# Altium PCB final_sensor_pcb_v3.PcbDoc (part 3 of 3)
Units mm, origin at the board's own origin, x right, y up, seen from the top; angles counter-clockwise.
Board outline 108.2 x 22.22 mm, 2 copper layers (Top Layer, Bottom Layer); 92 components, 55 nets, 247 pads, 83 vias.
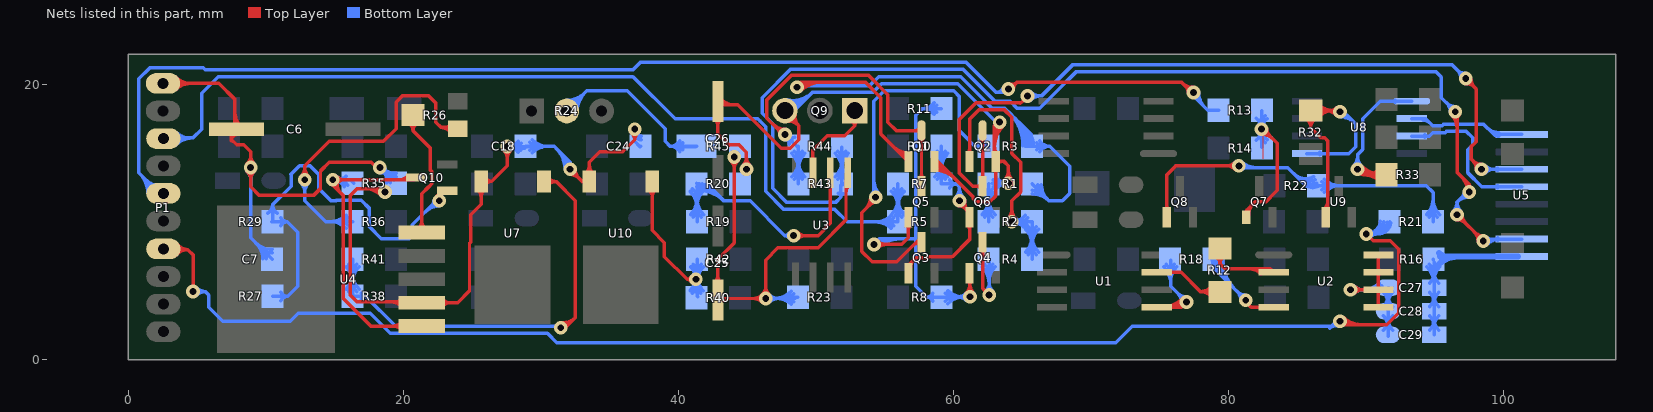
[diagram p3: the nets of this part, all layers, seen from the top]

## Via types
v1: diameter 1, hole 0.5, Top Layer to Bottom Layer, 83 vias

## Nets (pads, with @x,y where several pads share a name; then routed paths per layer and width w, separated by ;. In a path a pad name is that pad's centre, name@x,y a point inside that pad or via, vN(x,y) a via of type N, cw(c..) or ccw(c..) an arc to the next point about the centre after c; other vN are vias at no path point) (continued)
NetC25_1: C25.1 R23.1 R45.2 U3.5 | length 43.2
  Top Layer w0.254: C25.1@42.68,5.636 ccw(c42.214,6.102) 42.873,6.102 ccw(c43.532,6.102) C25.1@43.066,5.636 ; C25.1@42.873,4.343 42.873,7.289 44.069,8.486 v1(44.069,14.732) ; C25.1@43.053,4.572 42.926,4.445 v1(46.355,4.445) 46.355,7.239 47.244,8.128 50.165,8.128 52.197,10.16 52.197,13.458 U3.5@52.324,13.585 ; C25.1@43.066,4.15 cw(c43.777,3.439) 43.777,4.445 ; C25.1@43.066,4.536 ccw(c43.287,4.757) 43.287,4.445 ; v1@43.805,14.468 cw(c43.169,13.832) 44.069,13.832 cw(c44.969,13.832) v1@44.333,14.468 ; v1@46.091,4.181 ccw(c45.455,3.545) 45.455,4.445 ccw(c45.455,5.345) 46.091,4.709 ccw(c45.455,5.345) 46.355,5.345 ccw(c47.255,5.345) v1@46.619,4.709 ; 52.197,12.131 cw(c52.928,12.131) U3.5@52.411,12.648
  Bottom Layer w0.254: v1(44.069,14.732) R45.2@44.069,15.113 ; v1(46.355,4.445) R23.1@48.514,4.445 ; v1@46.619,4.181 cw(c47.255,3.545) 47.255,4.445 cw(c47.255,5.345) v1@46.619,4.709 ; 46.942,4.445 ccw(c46.942,6.246) R23.1@48.216,4.973 ; 47.192,4.445 cw(c47.192,2.997) R23.1@48.216,4.021 ; 47.556,4.445 ccw(c47.556,5.633) R23.1@48.396,4.793 ; 47.805,4.445 cw(c47.805,3.61) R23.1@48.396,4.2 ; R23.1@48.285,4.547 R23.1@48.692,4.547
NetC27_1: C27.1 C28.1 C29.1 U2.5 U2.6 U2.7 U2.8 | length 28
  Top Layer w0.254: v1(88.9,5.08) U2.6@90.928,5.08 ; v1@89.164,4.816 cw(c89.801,4.179) 89.801,5.08 cw(c89.8,5.98) v1@89.164,5.344 ; U2.6@89.991,4.993 ccw(c89.781,4.783) 89.781,5.08 ccw(c89.781,5.377) U2.6@89.991,5.167 ; U2.5@90.841,3.897 ccw(c90.631,4.107) 90.928,4.107 ccw(c91.225,4.107) U2.5@91.015,3.897 ; U2.6@90.841,4.993 cw(c90.631,4.783) 90.928,4.783 cw(c91.225,4.783) U2.6@91.015,4.993 ; U2.6@90.841,5.167 ccw(c90.631,5.377) 90.928,5.377 ccw(c91.225,5.377) U2.6@91.015,5.167 ; U2.7@90.841,6.263 cw(c90.631,6.053) 90.928,6.053 cw(c91.225,6.053) U2.7@91.015,6.263 ; U2.7@90.841,6.437 ccw(c90.631,6.647) 90.928,6.647 ccw(c91.225,6.647) U2.7@91.015,6.437 ; U2.8@90.841,7.533 cw(c90.631,7.323) 90.928,7.323 cw(c91.225,7.323) U2.8@91.015,7.533 ; U2.5@90.928,3.814 U2.6@90.928,5.08 ; U2.8@90.928,7.62 U2.7@90.928,6.35 U2.6@90.928,5.08
  Bottom Layer w0.254: v1(88.9,5.08) C27.1@91.631,5.08 ; v1@89.164,4.816 cw(c89.8,4.18) 89.8,5.08 cw(c89.8,5.98) v1@89.164,5.344 ; 89.821,5.08 ccw(c89.821,6.742) C27.1@90.996,5.567 ; 90.434,5.08 ccw(c90.434,6.129) C27.1@91.176,5.387 ; 90.557,5.08 cw(c90.557,4.458) C27.1@90.996,4.898 ; C29.1@91.296,2.138 ccw(c90.489,2.945) 91.631,2.945 ccw(c92.773,2.945) C29.1@91.965,2.138 ; C28.1@91.296,3.183 cw(c90.489,2.376) 91.631,2.376 cw(c92.773,2.376) C28.1@91.965,3.183 ; C28.1@91.296,3.852 ccw(c90.489,4.66) 91.631,4.66 ccw(c92.773,4.66) C28.1@91.965,3.852 ; C27.1@91.296,4.898 cw(c90.489,4.09) 91.631,4.09 cw(c92.773,4.09) C27.1@91.965,4.898 ; C29.1@91.631,1.714 C29.1@91.631,1.803 C28.1@91.631,3.518 C27.1@91.631,5.08 ; C27.1@91.631,5.232 C27.1@91.631,5.08 ; C27.1@91.694,5.08 C27.1@91.631,5.08
NetQ1_1: Q1.1 R1.1 R3.1 | length 62
  Top Layer w0.254: v1@48.546,19.907 cw(c49.235,19.218) 49.235,20.193 ; v1@48.641,19.939 48.895,20.193 53.594,20.193 54.737,19.05 54.737,16.415 Q1.1@56.739,14.413 ; v1@48.725,19.728 cw(c49.848,18.605) 49.848,20.193 ; v1@48.905,19.548 cw(c50.461,17.992) 50.461,20.193 ; 55.675,15.477 ccw(c56.739,16.54) Q1.1@56.739,15.036 ; 56.109,15.043 ccw(c56.739,15.673) Q1.1@56.739,14.782 ; Q1.1@56.543,14.609 ccw(c56.739,14.806) Q1.1@56.739,14.528
  Bottom Layer w0.254: v1(48.641,19.812) 48.768,19.939 53.935,19.939 54.57,20.574 60.535,20.574 61.585,19.524 62.821,18.288 63.754,18.288 65.659,16.383 R3.1@65.659,15.519 ; 64.065,17.977 cw(c61.657,15.569) R3.1@65.062,15.569 ; 64.498,17.544 cw(c62.524,15.569) R3.1@65.316,15.569 ; 64.932,17.11 cw(c63.391,15.569) R3.1@65.57,15.569 ; R3.1@65.253,15.519 R3.1@65.659,15.519 ; 65.366,16.676 cw(c64.259,15.569) R3.1@65.824,15.569 ; R1.1@65.735,12.053 cw(c65.735,10.308) 66.969,11.542 ; R1.1@65.735,12.307 cw(c65.735,11.175) 66.536,11.975 ; R1.1@65.735,12.776 66.954,11.557 67.945,11.557 68.473,12.085 68.473,14.077 67.031,15.519 ; R3.1@66.078,15.278 cw(c66.542,14.953) 66.542,15.519 cw(c66.542,16.086) R3.1@66.078,15.76 ; R1.1@66.154,12.726 ccw(c67.045,12.726) R1.1@66.415,12.096 ; R3.1@66.286,15.132 cw(c67.031,14.609) 67.031,15.519 ; R3.1@66.286,15.906 ccw(c67.031,16.43) 67.031,15.519 ; R1.1@66.408,12.726 ccw(c67.912,12.726) 66.849,11.663 ; R3.1@65.659,15.519 R3.1@65.735,15.519 67.031,15.519
NetQ1_3: Q1.3 Q5.3 R43.1 R44.1 | length 40.5
  Top Layer w0.254: 46.898,17.11 ccw(c47.752,17.963) v1@47.752,16.756 ; 47.205,16.803 cw(c46.785,16.383) v1@47.379,16.383 ; 47.332,16.676 ccw(c47.752,17.096) v1@47.752,16.502 ; v1@47.498,16.51 46.446,17.562 46.446,18.887 48.26,20.701 53.804,20.701 55.245,19.26 55.245,17.272 55.854,16.663 Q1.3@57.689,16.663 ; Q5.3@57.567,13.171 ccw(c57.271,13.467) 57.689,13.467 ccw(c58.107,13.467) Q5.3@57.811,13.171 ; Q1.3@57.567,16.091 cw(c57.271,15.795) 57.689,15.795 cw(c58.107,15.795) Q1.3@57.811,16.091 ; Q1.3@57.567,16.541 ccw(c57.271,16.245) 57.271,16.663 ccw(c57.271,17.081) Q1.3@57.567,16.785 ; Q5.3@57.689,12.599 Q1.3@57.689,16.541
  Bottom Layer w0.254: v1@47.752,16.01 cw(c47.752,15.11) 48.389,15.746 cw(c49.025,16.383) v1@48.125,16.383 ; v1(47.752,16.383) R44.1@48.641,15.494 ; R44.1@48.061,15.648 ccw(c47.273,15.74) 47.834,16.301 ccw(c48.23,16.698) R44.1@48.457,16.185 ; R43.1@48.253,13.302 ccw(c47.104,14.451) 48.729,14.451 ccw(c50.354,14.451) R43.1@49.205,13.302 ; R44.1@48.253,14.993 cw(c47.104,13.845) 48.729,13.845 cw(c50.354,13.845) R44.1@49.205,14.993 ; R43.1@48.433,13.122 ccw(c47.718,13.838) 48.729,13.838 ccw(c49.741,13.838) R43.1@49.025,13.122 ; R44.1@48.433,15.173 cw(c47.718,14.458) 48.729,14.458 cw(c49.741,14.458) R44.1@49.025,15.173 ; R43.1@48.729,12.776 R44.1@48.729,15.519 R44.1@48.729,15.533
NetQ2_1: Q2.1 R2.1 R4.1 | length 35
  Top Layer w0.254: Q2.1@61.062,14.985 ccw(c60.766,15.281) 61.184,15.281 ccw(c61.602,15.281) Q2.1@61.306,14.985 ; Q2.1@61.184,14.413 61.184,17.496 61.849,18.161 63.73,18.161 64.254,17.637 64.254,14.994 64.897,14.351 64.897,12.192 64.262,11.557 v1(64.262,10.033) ; v1@63.998,10.297 ccw(c63.362,10.933) 64.262,10.933 ccw(c65.162,10.933) v1@64.526,10.297
  Bottom Layer w0.254: v1(64.262,10.033) 64.168,10.033 v1@64.151,10.017 ; v1@64.526,9.769 cw(c65.123,9.172) R2.1@65.123,10.017 ; v1@64.526,10.297 ccw(c65.202,10.973) R2.1@65.202,10.017 ; R2.1@65.251,9.549 ccw(c64.151,8.49) v1@64.151,10.017 ; R2.1@65.251,10.484 cw(c64.151,11.543) v1@64.151,10.017 ; R4.1@65.259,7.816 ccw(c64.11,8.965) 65.735,8.965 ccw(c67.36,8.965) R4.1@66.211,7.816 ; R2.1@65.259,9.491 cw(c64.11,8.342) 65.735,8.342 cw(c67.36,8.342) R2.1@66.211,9.491 ; R2.1@65.434,9.726 ccw(c64.749,9.066) 64.749,10.017 ccw(c64.749,10.967) R2.1@65.434,10.307 ; R4.1@65.439,7.636 ccw(c64.724,8.351) 65.735,8.351 ccw(c66.747,8.351) R4.1@66.031,7.636 ; R2.1@65.439,9.67 cw(c64.724,8.955) 65.735,8.955 cw(c66.747,8.955) R2.1@66.031,9.67 ; R4.1@65.735,7.29 R2.1@65.735,10.017 v1@64.151,10.017
NetQ3_1: Q3.1 Q6.1 R7.1 R10.1 | length 28.3
  Top Layer w0.254: Q3.1@56.739,6.285 56.739,6.867 57.276,7.404 58.147,7.404 58.236,7.493 59.944,7.493 61.184,8.733 Q6.1@61.184,10.349 61.184,10.698 60.706,11.176 60.706,11.43 60.579,11.303 60.452,11.303 v1(60.452,11.557) ; Q3.1@56.912,6.735 cw(c57.648,6.735) 57.127,7.255 ; v1@60.452,11.184 cw(c60.452,10.59) 60.872,11.01 ; 60.757,11.125 ccw(c61.132,11.501) Q6.1@61.171,10.972 ; v1@60.824,11.536 ccw(c61.839,11.48) Q6.1@61.12,10.762 ; Q6.1@61.062,9.777 cw(c60.766,9.481) 61.184,9.481 cw(c61.602,9.481) Q6.1@61.306,9.777
  Bottom Layer w0.254: R7.1@58.655,13.302 ccw(c57.506,14.451) 59.131,14.451 ccw(c60.756,14.451) R7.1@59.607,13.302 ; R10.1@58.655,14.993 cw(c57.506,13.845) 59.131,13.845 cw(c60.756,13.845) R10.1@59.607,14.993 ; R7.1@58.835,13.122 ccw(c58.12,13.838) 59.131,13.838 ccw(c60.143,13.838) R7.1@59.427,13.122 ; R10.1@58.835,15.173 cw(c58.12,14.458) 59.131,14.458 cw(c60.143,14.458) R10.1@59.427,15.173 ; R10.1@59.131,15.519 R7.1@59.131,12.776 60.249,12.776 ; R7.1@59.726,12.461 cw(c60.249,12.185) 60.249,12.776 ; R7.1@59.726,13.091 ccw(c60.249,13.368) 60.249,12.776 ; v1@60.188,11.821 ccw(c59.552,12.457) 60.452,12.457 ccw(c61.352,12.457) v1@60.716,11.821 ; v1@60.452,11.684 60.452,12.573 60.249,12.776
NetQ3_3: Q3.3 R3.2 | length 35.5
  Top Layer w0.254: 53.629,10.957 ccw(c52.776,11.811) v1@53.983,11.811 ; 53.936,11.264 cw(c54.356,10.844) v1@54.356,11.438 ; 54.063,11.391 ccw(c53.643,11.811) v1@54.237,11.811 ; v1(54.356,11.811) 54.356,11.684 53.348,10.676 53.348,7.866 54.102,7.112 55.88,7.112 57.303,8.535 Q3.3@57.689,8.535 ; 57.11,8.342 cw(c57.382,8.071) Q3.3@57.594,8.391 ; 57.33,8.562 cw(c57.557,8.335) Q3.3@57.734,8.603 ; Q3.3@57.56,8.42 ccw(c57.303,8.191) 57.303,8.535 ccw(c57.303,8.879) Q3.3@57.56,8.65
  Bottom Layer w0.254: v1@54.092,12.075 ccw(c53.762,12.405) 54.229,12.405 ccw(c54.95,12.405) v1@54.44,11.895 ; 54.229,13.018 ccw(c55.563,13.018) v1@54.62,12.075 ; v1(54.356,11.811) 54.229,11.938 54.229,18.796 54.991,19.558 60.025,19.558 60.452,19.131 60.452,16.637 61.57,15.519 ; R3.2@61.949,15.265 ccw(c61.57,15.109) 61.57,15.519 ; R3.2@61.949,15.774 cw(c61.57,15.93) 61.57,15.519 ; R3.2@62.103,15.989 R3.2@62.572,15.519 61.57,15.519
NetQ4_1: Q4.1 Q5.1 R8.1 R11.1 | length 45.9
  Top Layer w0.254: v1(54.229,8.382) 56.261,8.382 56.739,8.86 Q5.1@56.739,10.349 Q5.1@56.674,10.414 ; v1@54.493,8.118 cw(c55.129,7.482) 55.129,8.382 cw(c55.129,9.282) v1@54.493,8.646 ; Q5.1@56.617,9.777 cw(c56.321,9.481) 56.739,9.481 cw(c57.157,9.481) Q5.1@56.861,9.777 ; v1@60.95,4.836 ccw(c60.314,5.472) 61.214,5.472 ccw(c62.114,5.472) v1@61.478,4.836 ; Q4.1@61.062,5.713 cw(c60.694,5.345) 61.214,5.345 ; v1(61.214,4.572) Q4.1@61.214,6.255 ; 61.214,5.49 cw(c61.529,5.49) Q4.1@61.306,5.713
  Bottom Layer w0.254: v1@54.134,8.477 cw(c54.878,7.733) 54.878,8.786 ; v1(54.229,8.382) 54.633,8.786 57.173,8.786 57.277,8.89 ; v1@54.313,8.298 cw(c55.491,7.12) 55.491,8.786 ; v1@54.493,8.118 cw(c56.104,6.507) 56.104,8.786 ; R8.1@58.524,4.257 ccw(c58.064,4.038) 58.064,4.547 ; R8.1@58.524,4.836 cw(c58.064,5.055) 58.064,4.547 ; R11.1@58.599,17.851 ccw(c57.76,17.201) 57.76,18.263 ; R11.1@58.599,18.674 cw(c57.76,19.324) 57.76,18.263 ; R11.1@58.8,18.006 ccw(c58.277,17.602) 58.277,18.263 ccw(c58.277,18.923) R11.1@58.8,18.519 ; R11.1@59.131,18.263 57.76,18.263 ; R8.1@59.427,4.25 cw(c60.143,3.535) 60.143,4.547 cw(c60.143,5.558) R8.1@59.427,4.843 ; R8.1@59.607,4.071 cw(c60.756,2.922) 60.756,4.547 cw(c60.756,6.171) R8.1@59.607,5.022 ; 60.252,4.547 ccw(c60.252,5.534) v1@60.95,4.836 ; 60.375,4.547 cw(c60.375,3.733) v1@60.95,4.308 ; v1(61.214,4.572) 61.189,4.547 R8.1@59.131,4.547 58.064,4.547 ; 57.277,8.89 57.277,17.78 57.76,18.263 ; 57.277,8.89 57.277,5.334 58.064,4.547
NetQ4_3: Q4.3 R4.2 | length 12.9
  Top Layer w0.254: Q4.3@62.012,7.963 cw(c61.716,7.667) 62.134,7.667 cw(c62.552,7.667) Q4.3@62.256,7.963 ; Q4.3@62.134,8.535 62.134,5.176 v1(62.611,4.699)
  Bottom Layer w0.254: R4.2@62.096,6.764 cw(c60.854,5.521) 62.611,5.521 ; R4.2@62.276,6.944 cw(c61.467,6.135) 62.611,6.135 ; v1@62.347,4.963 ccw(c61.711,5.599) 62.611,5.599 ccw(c63.511,5.599) v1@62.875,4.963 ; R4.2@62.572,7.29 62.611,7.251 v1(62.611,4.699) ; 62.611,5.709 cw(c64.103,5.709) R4.2@63.048,6.764 ; 62.611,6.322 cw(c63.49,6.322) R4.2@62.868,6.944
NetQ7_1: Q7.1 R13.2 R14.2 | length 23.7
  Top Layer w0: 82.55,14.629 v1@82.55,16.637
  Top Layer w0.254: Q7.1@81.233,10.549 cw(c81.712,10.549) 81.373,10.888 ; Q7.1@81.314,10.38 Q7.1@81.314,10.349 81.314,10.829 81.953,11.468 82.721,11.468 83.566,12.313 83.566,15.748 v1@82.55,16.764 ; Q7.1@81.487,10.549 cw(c82.579,10.549) 81.807,11.322 ; v1@82.423,16.391 cw(c82.423,15.184) 83.277,16.037 ; v1@82.423,16.645 cw(c82.423,16.051) 82.843,16.471 ; v1@82.796,16.764 ccw(c83.39,16.764) 82.97,16.344
  Bottom Layer w0.254: R14.2@82.04,15.968 ccw(c81.404,16.764) v1(82.423,16.764) ; R13.2@82.04,17.56 cw(c81.403,16.764) v1(82.423,16.764) ; v1@82.159,16.5 cw(c81.523,15.864) 82.423,15.864 cw(c83.323,15.864) v1@82.687,16.5 ; v1@82.159,17.028 ccw(c81.523,17.664) 82.423,17.664 ccw(c83.323,17.664) v1@82.687,17.028 ; R14.2@82.423,15.43 v1(82.423,16.764) ; v1@82.423,16.291 ccw(c83.022,16.291) R14.2@82.692,15.792 ; v1@82.423,17.236 cw(c83.023,17.236) R13.2@82.692,17.736 ; R13.2@82.423,18.098 v1(82.423,16.764) ; R14.2@82.832,16.004 cw(c83.335,16.764) v1(82.423,16.764) ; R13.2@82.832,17.524 ccw(c83.335,16.764) v1(82.423,16.764)
NetQ8_1: Q8.1 R21.2 R22.2 | length 43.3
  Top Layer w0.254: Q8.1@75.413,10.921 ccw(c75.117,11.217) 75.535,11.217 ccw(c75.953,11.217) Q8.1@75.657,10.921 ; Q8.1@75.535,10.349 75.535,13.432 76.2,14.097 v1(80.772,14.097) ; v1@80.508,13.833 ccw(c79.872,13.197) 79.872,14.097 ccw(c79.872,14.997) v1@80.508,14.361
  Bottom Layer w0.254: v1(80.772,14.097) 80.899,13.97 84.328,13.97 85.649,12.649 R22.2@86.524,12.649 94.412,12.649 94.908,12.153 R21.2@94.908,10.016 ; v1@80.856,14.181 ccw(c81.366,14.691) 81.366,13.97 ccw(c81.366,13.503) v1@81.036,13.833 ; v1@81.036,14.361 ccw(c81.979,15.304) 81.979,13.97 ; 84.791,13.507 ccw(c85.645,14.361) R22.2@86.21,13.294 ; 85.034,13.264 ccw(c85.813,14.043) R22.2@86.328,13.069 ; 85.277,13.021 ccw(c85.981,13.725) R22.2@86.447,12.845 ; 85.52,12.778 ccw(c86.15,13.407) R22.2@86.566,12.62 ; R22.2@86.821,12.353 cw(c87.536,11.637) 87.536,12.649 cw(c87.536,13.661) R22.2@86.821,12.945 ; R22.2@87,12.173 cw(c88.149,11.024) 88.149,12.649 cw(c88.149,14.274) R22.2@87,13.125 ; R21.2@94.432,10.542 ccw(c93.283,11.691) 94.908,11.691 ccw(c96.533,11.691) R21.2@95.384,10.542 ; R21.2@94.612,10.363 ccw(c93.896,11.078) 94.908,11.078 ccw(c95.919,11.078) R21.2@95.204,10.363
NetQ9_1: Q9.1 U3.7 | length 8
  Top Layer w0.254: U3.7@49.697,14.522 ccw(c49.487,14.732) 49.784,14.732 ccw(c50.081,14.732) U3.7@49.871,14.522 ; U3.7@49.784,13.585 49.784,15.24 50.825,16.281 52.095,16.281 52.832,17.018 ; Q9.1@52.59,17.35 cw(c52.484,17.018) 52.832,17.018 ; Q9.1@52.705,17.475 52.832,17.602 Q9.1@52.826,17.602 ; Q9.1@52.832,18.034 52.832,17.018 ; Q9.1@53.074,17.35 ccw(c53.18,17.018) 52.832,17.018
NetQ10_1: Q10.1 R27.1 R29.2 | length 37.4
  Top Layer w0.254: v1@22.424,11.883 ccw(c22.252,12.192) Q10.1@22.606,12.192 ; v1(22.606,11.557) Q10.1@22.606,12.192 ; v1@22.606,11.574 cw(c23.444,11.574) Q10.1@22.851,12.167 ; Q10.1@22.733,12.319 Q10.1@22.606,12.192 ; v1@22.788,11.883 cw(c22.96,12.192) Q10.1@22.606,12.192
  Bottom Layer w0.254: R29.2@10.138,10.662 ccw(c9.782,11.263) 10.48,11.263 ; R29.2@10.414,10.033 11.557,10.033 ; R29.2@10.48,10.607 R29.2@10.48,10.033 10.48,11.263 ; R27.1@10.49,4.597 11.582,4.597 ; R29.2@10.823,10.662 cw(c11.179,11.263) 10.48,11.263 ; R29.2@11.085,9.738 cw(c11.557,9.508) 11.557,10.033 ; R29.2@11.085,10.328 ccw(c11.557,10.558) 11.557,10.033 ; R27.1@11.091,4.295 cw(c11.582,4.048) 11.582,4.597 ; R27.1@11.091,4.9 ccw(c11.582,5.147) 11.582,4.597 ; 15.102,11.592 16.937,11.592 17.534,10.995 17.534,9.668 18.4,8.802 20.428,8.802 20.651,9.025 20.651,9.799 v1@22.409,11.557 ; 15.113,11.557 14.732,11.557 13.843,12.446 13.843,13.462 13.208,14.097 12.446,14.097 11.822,13.473 11.837,13.459 11.837,12.62 10.48,11.263 ; 21.633,10.781 cw(c22.606,9.807) v1@22.606,11.184 ; 22.066,11.214 cw(c22.606,10.674) v1@22.606,11.438 ; 22.109,11.257 ccw(c21.809,11.557) v1@22.233,11.557 ; v1@22.225,11.557 v1@22.409,11.557 ; v1(22.606,11.557) v1@22.409,11.557 ; 11.557,10.033 12.319,9.271 12.319,5.334 11.582,4.597
NetQ10_3: Q10.3 R35.1 U4.1 | length 32.5
  Top Layer w0.254: v1@14.973,13.047 ccw(c15.569,12.869) 15.129,12.43 ; v1@15.123,12.817 cw(c15.759,12.181) 15.759,13.081 cw(c15.759,13.981) v1@15.123,13.345 ; v1@15.216,12.974 ccw(c16.033,12.731) 15.43,12.129 ; 19.68,13.081 ccw(c19.68,14.038) Q10.3@20.357,13.361 ; U4.1@19.872,2.178 ccw(c19.236,1.542) 19.236,2.442 ccw(c19.236,3.342) U4.1@19.872,2.706 ; Q10.3@20.929,13.239 20.771,13.081 15.175,13.081 15.017,13.239 v1(14.859,13.081) 14.859,12.7 15.621,11.938 15.621,4.445 17.624,2.442 U4.1@21.336,2.442
  Bottom Layer w0.254: v1@15.123,12.817 cw(c15.759,12.181) 15.759,13.081 cw(c15.759,13.981) v1@15.123,13.345 ; v1@15.184,13.081 ccw(c15.184,13.996) R35.1@15.831,13.349 ; v1@15.277,13.081 cw(c15.277,12.34) R35.1@15.935,12.681 ; R35.1@15.709,12.564 ccw(c14.859,12.124) v1(14.859,13.081) 16.129,13.081 R35.1@16.383,12.827
NetR12_1: R12.1 U2.2 | length 8.4
  Top Layer w0.254: R12.1@79.08,7.497 cw(c78.789,6.96) 79.4,6.96 ; R12.1@79.4,8.089 79.4,6.96 ; R12.1@79.721,7.497 ccw(c80.012,6.96) 79.4,6.96 ; 81.552,6.604 cw(c81.552,5.44) U2.2@82.375,6.263 ; 82.165,6.604 cw(c82.165,6.053) U2.2@82.555,6.443 ; U2.2@83.189,6.35 ccw(c82.892,6.35) 83.102,6.56 ccw(c83.312,6.77) U2.2@83.312,6.473 ; U2.2@83.312,6.35 83.058,6.604 79.756,6.604 79.4,6.96
NetR18_1: R18.1 U2.4 | length 14.8
  Top Layer w0.254: v1(81.28,4.318) 81.28,4.191 81.661,3.81 U2.4@83.312,3.81 ; U2.4@82.375,3.723 ccw(c82.165,3.513) 82.165,3.81 ccw(c82.165,4.107) U2.4@82.375,3.897
  Bottom Layer w0.254: R18.1@78.854,7.24 ccw(c80.051,7.24) 79.205,6.393 ; R18.1@78.943,7.29 78.943,6.655 v1(81.28,4.318) ; R18.1@79.108,7.24 ccw(c80.918,7.24) 79.638,5.96 ; R18.1@79.362,7.24 ccw(c81.786,7.24) 80.072,5.526 ; R18.1@79.616,7.24 ccw(c82.653,7.24) 80.506,5.092 ; v1@80.907,4.318 ccw(c80.007,4.318) 80.643,4.955 ccw(c81.28,5.591) v1@81.28,4.691
NetR19_2: R19.2 R20.1 U3.6 | length 34.1
  Top Layer w0.254: v1(48.387,9.017) 50.165,9.017 51.054,9.906 U3.6@51.054,13.585 ; v1@48.651,8.753 cw(c49.287,8.117) 49.287,9.017 cw(c49.287,9.917) v1@48.651,9.281 ; U3.6@50.967,12.648 cw(c50.757,12.438) 51.054,12.438 cw(c51.351,12.438) U3.6@51.141,12.648
  Bottom Layer w0.254: R20.1@40.85,12.25 cw(c39.611,11.011) 41.363,11.011 ; R19.2@40.887,10.543 ccw(c39.738,11.691) 41.363,11.691 ccw(c42.988,11.691) R19.2@41.839,10.543 ; R20.1@41.03,12.43 cw(c40.224,11.624) 41.363,11.624 ; R19.2@41.067,10.363 ccw(c40.352,11.078) 41.363,11.078 ccw(c42.375,11.078) R19.2@41.659,10.363 ; R20.1@41.322,12.815 cw(c41.397,11.247) 42.507,12.357 ; R20.1@41.334,12.561 cw(c41.434,10.472) 42.913,11.951 ; R20.1@41.346,12.308 cw(c41.471,9.697) 43.319,11.545 ; R19.2@41.363,10.017 R20.1@41.363,12.739 ; 41.363,11.192 cw(c42.86,11.192) R20.1@41.802,12.25 ; 41.363,11.805 cw(c42.247,11.805) R20.1@41.622,12.43 ; R20.1@41.402,12.7 42.164,12.7 43.319,11.545 ; v1@48.061,8.835 ccw(c47.752,8.663) 47.752,9.017 ; v1@48.061,9.199 cw(c47.752,9.371) 47.752,9.017 ; v1(48.387,9.017) 47.752,9.017 ; 43.319,11.545 45.224,11.545 47.752,9.017
NetR24_2: R24.2 R45.1 | length 20.9
  Bottom Layer w0.254: R24.2@31.877,18.085 33.35,19.558 36.278,19.558 39.036,16.8 39.036,15.875 39.392,15.519 ; R24.2@31.877,18.604 ccw(c31.877,19.857) 32.763,18.971 ccw(c33.649,18.085) R24.2@32.396,18.085 ; R24.2@31.877,18.858 ccw(c31.877,20.724) 33.197,19.405 ccw(c34.516,18.085) R24.2@32.65,18.085 ; R45.1@40.12,15.125 ccw(c39.392,14.651) 39.392,15.519 ; R45.1@40.12,15.914 cw(c39.392,16.388) 39.392,15.519 ; R45.1@40.333,15.263 ccw(c39.861,14.956) 39.861,15.519 ccw(c39.861,16.083) R45.1@40.333,15.775 ; R45.1@40.386,15.494 R45.1@41.275,15.494 ; R45.1@41.326,15.519 39.392,15.519
NetR26_1: R26.1 R36.1 | length 31.7
  Top Layer w0.254: v1@12.563,13.345 ccw(c11.927,13.981) 12.827,13.981 ccw(c13.727,13.981) v1@13.091,13.345 ; v1@12.827,13.208 12.827,14.097 14.613,15.883 18.55,15.883 19.471,16.804 19.471,18.738 19.91,19.177 21.844,19.177 22.352,18.669 22.352,17.272 22.733,16.891 ; 22.978,16.891 ccw(c22.978,17.654) R26.1@23.518,17.114 ; 23.22,16.891 cw(c23.22,16.339) R26.1@23.672,16.655 ; R26.1@23.464,16.51 ccw(c22.733,16) 22.733,16.891 ; R26.1@24.003,16.891 22.733,16.891
  Bottom Layer w0.254: v1@12.563,12.817 cw(c11.927,12.181) 12.827,12.181 cw(c13.727,12.181) v1@13.091,12.817 ; v1(12.827,13.081) 12.827,11.557 14.351,10.033 R36.1@16.307,10.033 ; R36.1@15.831,9.557 ccw(c14.682,8.408) 14.682,10.033 ccw(c14.682,11.658) R36.1@15.831,10.509 ; R36.1@16.011,9.737 ccw(c15.295,9.022) 15.295,10.033 ccw(c15.295,11.045) R36.1@16.011,10.329
NetR26_2: R26.2 U4.5 | length 12
  Top Layer w0.254: R26.2@20.375,17.192 cw(c20.066,16.637) 20.701,16.637 ; R26.2@20.701,17.653 20.701,16.637 ; R26.2@21.028,17.191 ccw(c21.334,16.637) 20.701,16.637 ; U4.5@21.072,9.506 ccw(c20.436,10.142) 21.336,10.142 ccw(c22.236,10.142) U4.5@21.6,9.506 ; U4.5@21.336,9.242 21.336,12.065 21.829,12.558 21.837,12.558 22.06,12.781 22.06,13.697 21.971,13.786 21.971,15.367 20.701,16.637
NetR32_1: R32.1 U8.5 U9.1 | length 27.7
  Top Layer w0.254: R32.1@85.636,17.547 cw(c85.19,16.866) 86.004,16.866 ; R32.1@86.351,17.814 cw(c87.066,17.099) 87.066,18.11 cw(c87.066,19.122) R32.1@86.351,18.406 ; R32.1@86.373,17.547 ccw(c86.819,16.866) 86.004,16.866 ; R32.1@86.53,17.634 cw(c87.679,16.485) 87.679,18.11 cw(c87.679,19.735) R32.1@86.53,18.586 ; U9.1@86.97,10.921 ccw(c86.328,11.563) 87.235,11.563 ; 87.054,18.11 cw(c87.054,16.95) v1@87.874,17.77 ; U9.1@87.092,10.349 87.235,10.492 87.235,15.905 87.012,16.128 86.742,16.128 86.004,16.866 ; 87.421,18.11 ccw(c87.421,18.751) v1@87.874,18.298 ; v1@88.062,18.11 R32.1@86.004,18.11 86.004,16.866
  Bottom Layer w0.254: U8.5@85.729,14.986 88.773,14.986 89.281,15.494 89.281,17.145 88.646,17.78 88.392,17.78 v1(88.138,18.034) ; U8.5@86.666,14.899 cw(c86.876,14.689) 86.876,14.986 cw(c86.876,15.283) U8.5@86.666,15.073 ; v1@88.138,17.661 cw(c88.138,16.147) 89.208,17.218 ; v1@88.138,17.915 cw(c88.138,17.015) 88.775,17.651
NetR33_2: R33.2 U8.1 | length 20.2
  Top Layer w0.254: v1@89.313,13.748 ccw(c90.063,14.498) 90.063,13.437 ; v1(89.408,13.843) 89.814,13.437 R33.2@91.528,13.437 ; v1@89.492,13.927 ccw(c90.676,15.111) 90.676,13.437 ; v1@89.672,14.107 ccw(c91.29,15.725) R33.2@91.29,13.437 ; R33.2@91.052,12.961 ccw(c89.903,11.812) 89.903,13.437 ccw(c89.903,15.061) R33.2@91.052,13.912 ; R33.2@91.232,13.14 ccw(c90.517,12.425) 90.517,13.437 ccw(c90.517,14.448) R33.2@91.232,13.733
  Bottom Layer w0.254: v1@89.144,14.107 ccw(c88.508,14.743) 89.408,14.743 ccw(c90.308,14.743) v1@89.672,14.107 ; v1(89.408,13.843) 89.408,14.903 89.789,15.284 89.789,17.526 91.059,18.796 U8.1@93.345,18.796 ; U8.1@92.158,18.709 ccw(c91.948,18.499) 91.948,18.796 ccw(c91.948,19.093) U8.1@92.158,18.883
NetR38_1: R38.1 R41.2 U7.1 | length 44.1
  Top Layer w0.254: U7.1@30.353,12.954 31.115,12.954 ; U7.1@30.489,12.707 cw(c31.084,12.112) 31.084,12.954 ; U7.1@30.499,13.224 ccw(c31.115,13.791) 31.115,12.954 ; v1@31.457,2.436 ccw(c31.55,3.263) 32.139,2.675 ; v1@31.486,2.689 ccw(c31.626,3.934) 32.512,3.048 ; v1@31.623,2.159 32.512,3.048 ; 31.115,12.954 32.512,11.557 32.512,3.048
  Bottom Layer w0.254: R38.1@15.831,5.123 ccw(c14.682,6.272) 16.307,6.272 ccw(c17.932,6.272) R38.1@16.783,5.123 ; R41.2@15.831,6.764 cw(c14.682,5.615) 16.307,5.615 cw(c17.932,5.615) R41.2@16.783,6.764 ; R38.1@16.011,4.944 ccw(c15.295,5.659) 16.307,5.659 ccw(c17.318,5.659) R38.1@16.603,4.944 ; R41.2@16.011,6.944 cw(c15.295,6.228) 16.307,6.228 cw(c17.318,6.228) R41.2@16.603,6.944 ; R41.2@16.307,7.29 R38.1@16.307,4.597 17.247,4.597 ; R38.1@16.944,4.381 cw(c17.247,4.278) 17.247,4.597 ; R38.1@16.944,4.814 ccw(c17.247,4.917) 17.247,4.597 ; v1(31.444,2.318) 31.444,2.488 31.496,2.488 31.496,2.286 31.369,2.413 19.431,2.413 17.247,4.597
NetR40_1: R40.1 R42.2 U10.1 | length 25.8
  Top Layer w0.254: U10.1@37.835,12.407 cw(c37.198,11.771) 38.099,11.771 cw(c38.999,11.771) U10.1@38.363,12.407 ; U10.1@38.099,12.971 38.099,9.399 38.989,8.509 38.989,7.493 40.64,5.842 ; v1@40.949,5.66 ccw(c40.64,5.488) 40.64,5.842 ; v1@40.949,6.024 cw(c40.64,6.196) 40.64,5.842 ; v1(41.275,5.842) 40.64,5.842
  Bottom Layer w0.254: R40.1@40.85,5.022 ccw(c39.611,6.261) v1@41.363,6.261 ; R42.2@40.887,6.764 cw(c39.738,5.615) 41.363,5.615 cw(c42.988,5.615) R42.2@41.839,6.764 ; v1@41.011,5.578 cw(c40.162,4.729) R40.1@41.363,4.729 ; v1@41.011,6.106 ccw(c40.162,6.955) R42.2@41.363,6.955 ; R40.1@41.03,4.842 ccw(c40.224,5.648) v1@41.363,5.648 ; R42.2@41.067,6.944 cw(c40.352,6.228) 41.363,6.228 cw(c42.375,6.228) R42.2@41.659,6.944 ; v1@41.191,5.758 cw(c40.775,5.342) R40.1@41.363,5.342 ; v1@41.191,5.926 ccw(c40.775,6.342) 41.363,6.342 ; R40.1@41.363,5.154 cw(c41.963,5.154) v1@41.539,5.578 ; v1@41.363,5.467 ccw(c42.247,5.467) R40.1@41.622,4.842 ; v1@41.363,6.08 ccw(c42.86,6.08) R40.1@41.802,5.022 ; R42.2@41.363,6.53 ccw(c41.963,6.53) v1@41.539,6.106 ; R42.2@41.363,7.29 41.363,4.611 R40.1@41.402,4.572
OFFSET+: R43.2 R44.2 U5.2 | length 109.2
  Top Layer w0.254: v1@96.256,17.77 cw(c95.313,16.827) 96.647,16.827 ; v1@96.436,17.95 cw(c95.926,17.44) 96.647,17.44 cw(c97.114,17.44) v1@96.784,17.77 ; v1@96.647,10.168 cw(c96.647,9.268) 97.284,9.904 cw(c97.92,10.541) v1@97.02,10.541 ; v1(96.647,10.541) v1(98.552,8.636) ; v1@96.647,18.145 96.647,13.633 97.536,12.744 v1(97.536,12.192) ; 96.943,13.337 cw(c95.798,12.192) v1@97.417,12.192 ; 97.376,12.903 cw(c96.665,12.192) v1@97.671,12.192 ; v1@98.179,8.636 ccw(c97.279,8.636) 97.915,9.273 ccw(c98.552,9.909) v1@98.552,9.009
  Bottom Layer w0.254: R43.2@51.416,13.302 ccw(c50.267,14.451) 51.892,14.451 ccw(c53.517,14.451) R43.2@52.368,13.302 ; R44.2@51.416,14.993 cw(c50.267,13.845) 51.892,13.845 cw(c53.517,13.845) R44.2@52.368,14.993 ; R43.2@51.596,13.122 ccw(c50.881,13.838) 51.892,13.838 ccw(c52.904,13.838) R43.2@52.188,13.122 ; R44.2@51.596,15.173 cw(c50.881,14.458) 51.892,14.458 cw(c52.904,14.458) R44.2@52.188,15.173 ; R43.2@51.619,12.111 cw(c51.484,11.808) 51.816,11.808 cw(c52.08,11.808) R43.2@52.027,12.067 ; R43.2@51.816,12.7 51.816,11.811 51.435,11.43 47.887,11.43 46.863,12.454 46.863,17.152 46.101,17.914 46.101,19.05 48.189,21.138 60.689,21.138 63.032,18.796 64.135,18.796 64.635,18.296 66.302,18.296 67.31,19.304 ; R44.2@51.892,15.443 R43.2@51.892,12.776 ; R43.2@51.943,12.725 R43.2@51.892,12.776 ; R43.2@51.943,12.827 R43.2@51.892,12.776 ; 67.373,19.367 67.31,19.304 ; v1@96.147,18.034 ccw(c95.247,18.034) 95.883,18.671 ccw(c96.52,19.307) v1@96.52,18.407 ; v1@96.383,10.805 ccw(c95.747,11.441) 96.647,11.441 ccw(c97.547,11.441) v1@96.911,10.805 ; v1(96.52,18.034) 95.496,19.058 95.496,20.558 95.099,20.955 68.961,20.955 67.31,19.304 ; 96.641,11.448 cw(c97.536,10.554) v1@97.536,11.819 ; v1(96.647,10.541) 96.647,11.454 v1@97.46,12.268 ; 97.006,11.813 ccw(c96.627,12.192) v1@97.163,12.192 ; 97.075,11.882 cw(c97.536,11.421) v1@97.536,12.073 ; v1(98.552,8.636) 98.425,8.763 U5.2@101.346,8.763 ; v1@98.636,8.552 cw(c99.146,8.042) 99.146,8.763 cw(c99.146,9.23) v1@98.816,8.9 ; v1@98.816,8.372 cw(c99.759,7.429) U5.2@99.759,8.763 ; U5.2@99.604,8.676 ccw(c99.394,8.466) 99.394,8.763 ccw(c99.394,9.06) U5.2@99.604,8.85
OFFSET-: Q2.3 Q6.3 U5.6 | length 69
  Top Layer w0.254: Q6.3@62.012,12.477 ccw(c61.716,12.181) 61.716,12.599 ccw(c61.716,13.017) Q6.3@62.012,12.721 ; Q6.3@62.012,13.171 ccw(c61.716,13.467) 62.134,13.467 ccw(c62.552,13.467) Q6.3@62.256,13.171 ; Q2.3@62.012,16.091 cw(c61.716,15.795) 62.134,15.795 cw(c62.552,15.795) Q2.3@62.256,16.091 ; Q6.3@62.134,12.599 61.409,12.599 60.452,13.556 60.452,17.482 61.639,18.669 64.881,18.669 64.889,18.661 v1@65.389,19.034 ; Q6.3@62.134,12.599 Q2.3@62.134,16.663 ; v1@97.282,20.074 cw(c97.282,19.174) 97.919,19.81 cw(c98.555,20.447) v1@97.655,20.447 ; v1(97.282,20.447) 98.044,19.685 98.044,15.851 97.663,15.47 97.663,14.605 v1(98.425,13.843) v1@98.171,14.097 ; v1@98.052,13.843 ccw(c97.152,13.843) 97.788,14.48 ccw(c98.425,15.116) v1@98.425,14.216
  Bottom Layer w0.254: v1(65.405,19.177) 66.421,19.177 68.707,21.463 96.266,21.463 v1(97.282,20.447) ; v1@65.669,18.913 cw(c66.305,18.277) 66.305,19.177 cw(c66.305,20.077) v1@65.669,19.441 ; v1@96.909,20.447 ccw(c96.009,20.447) 96.645,21.084 ccw(c97.282,21.72) v1@97.282,20.82 ; v1(98.425,13.843) U5.6@101.346,13.843 ; v1@98.689,13.579 cw(c99.325,12.943) 99.325,13.843 cw(c99.325,14.743) v1@98.689,14.107 ; U5.6@99.604,13.756 ccw(c99.394,13.546) 99.394,13.843 ccw(c99.394,14.14) U5.6@99.604,13.93
OP_OUT: C26.1 Q1.2 Q2.2 Q9.3 R1.2 R2.2 R20.2 | length 88.3
  Top Layer w0.254: C26.1@42.682,17.478 cw(c42.216,17.012) 42.875,17.012 cw(c43.534,17.012) C26.1@43.068,17.478 ; C26.1@42.889,18.784 ccw(c43.473,19.368) 43.473,18.542 ; C26.1@43.068,18.964 ccw(c44.086,19.982) 44.086,18.542 ; v1@44.694,14.107 ccw(c44.077,14.724) 44.95,14.724 ; 44.95,14.763 ccw(c45.878,14.763) v1@45.222,14.107 ; v1(44.958,13.843) 44.958,14.351 44.946,14.363 44.95,14.367 44.95,15.097 44.434,15.613 43.704,15.613 43.7,15.609 42.875,16.434 C26.1@42.875,18.771 43.104,18.542 44.323,18.542 47.498,15.367 48.133,15.367 48.768,16.002 48.768,17.018 Q9.3@47.752,18.034 ; Q9.3@47.844,17.574 cw(c47.949,16.968) 48.383,17.403 ; Q9.3@47.887,17.324 cw(c48.05,16.377) 48.73,17.056 cw(c49.324,17.65) Q9.3@48.518,17.886 ; Q9.3@48.274,17.957 ccw(c48.855,17.787) 48.427,17.359 ; Q1.2@58.639,13.79 cw(c58.639,11.738) 60.09,13.189 ; Q1.2@58.639,14.044 cw(c58.639,12.605) 59.656,13.623 ; Q1.2@58.639,14.298 cw(c58.639,13.472) 59.223,14.056 ; Q1.2@58.639,14.413 58.866,14.413 61.453,11.826 61.453,11.691 61.676,11.468 62.614,11.468 62.626,11.48 62.661,11.48 63.084,11.903 Q2.2@63.084,14.413 ; Q1.2@58.639,14.552 cw(c58.639,14.34) Q1.2@58.789,14.49 ; Q2.2@62.962,13.841 cw(c62.666,13.545) 63.084,13.545 cw(c63.502,13.545) Q2.2@63.206,13.841 ; 62.992,15.452 cw(c65.193,15.452) v1@63.637,17.008 ; 62.992,15.503 ccw(c63.724,15.503) Q2.2@63.206,14.985 ; 62.992,16.065 cw(c64.58,16.065) v1@63.457,17.188 ; 62.992,16.678 cw(c63.967,16.678) v1@63.278,17.367 ; v1@62.992,17.018 62.992,14.505 Q2.2@63.084,14.413 ; Q2.2@63.206,14.291 cw(c63.502,13.995) 63.502,14.413 cw(c63.502,14.831) Q2.2@63.206,14.535 ; v1@63.744,13.091 ccw(c63.108,13.727) 64.008,13.727 ccw(c64.908,13.727) v1@64.272,13.091 ; v1(64.008,12.827) 64.008,14.097 63.692,14.413 Q2.2@63.084,14.413
  Bottom Layer w0.254: Q9.3@47.752,18.034 48.348,18.034 49.745,19.431 ; Q9.3@47.76,18.145 ccw(c47.986,19.207) 48.753,18.439 ; Q9.3@47.812,18.394 ccw(c48.102,19.752) 49.084,18.77 ; Q9.3@47.865,18.642 ccw(c48.218,20.297) 49.414,19.1 ; Q9.3@47.918,18.89 ccw(c48.334,20.841) 49.745,19.431 ; R2.2@62.096,10.543 ccw(c60.947,11.691) 62.572,11.691 ccw(c64.197,11.691) R2.2@63.048,10.543 ; R1.2@62.096,12.25 cw(c60.947,11.101) 62.572,11.101 cw(c64.197,11.101) R1.2@63.048,12.25 ; R2.2@62.276,10.363 ccw(c61.561,11.078) 62.572,11.078 ccw(c63.584,11.078) R2.2@62.868,10.363 ; R1.2@62.276,12.43 cw(c61.561,11.715) 62.572,11.715 cw(c63.584,11.715) R1.2@62.868,12.43 ; R2.2@62.572,10.017 R1.2@62.572,12.776 ; R1.2@62.826,12.827 v1(64.008,12.827) ; R1.2@62.895,12.558 cw(c63.467,12.083) 63.467,12.827 ; R1.2@62.894,13.095 ccw(c63.465,13.571) 63.465,12.827 ; R1.2@63.089,13.257 ccw(c64.008,14.023) v1(64.008,12.827) ; R1.2@63.09,12.396 cw(c64.008,11.634) v1(64.008,12.827) ; v1(63.373,17.272) 63.119,17.272 60.325,20.066 54.781,20.066 54.146,19.431 49.745,19.431 ; v1@63.744,12.563 ccw(c63.108,11.927) 63.108,12.827 ccw(c63.108,13.727) v1@63.744,13.091
OUT_N: U5.8 U8.2 | length 12.8
  Bottom Layer w0.254: U8.2@93.345,17.526 94.361,17.526 94.869,17.018 95.572,17.018 95.691,17.137 98.56,17.137 99.314,16.383 U5.8@101.346,16.383 U5.8@99.568,16.383 ; U8.2@94.195,17.403 cw(c94.195,16.705) 94.688,17.199 ; 98.837,16.86 ccw(c99.691,17.713) U5.8@99.691,16.506 ; 99.271,16.426 ccw(c99.691,16.846) U5.8@99.691,16.252 ; U5.8@99.604,16.296 ccw(c99.394,16.086) 99.394,16.383 ccw(c99.394,16.68) U5.8@99.604,16.47
OUT_P: U5.5 U8.3 | length 12.8
  Bottom Layer w0.254: U8.3@93.345,16.256 94.615,16.256 94.869,16.51 95.782,16.51 95.901,16.629 97.29,16.629 97.79,16.129 97.79,15.621 97.409,15.24 97.409,13.613 98.449,12.573 U5.5@101.346,12.573 ; U8.3@94.282,16.169 cw(c94.492,15.959) 94.492,16.256 cw(c94.492,16.553) U8.3@94.282,16.343 ; U5.5@99.604,12.486 ccw(c99.394,12.276) 99.394,12.573 ccw(c99.394,12.87) U5.5@99.604,12.66
OUT_RESET: R12.2 U1.7 | length 9.5
  Top Layer w0.254: U1.7@74.799,6.35 76.581,6.35 77.978,4.953 ; U1.7@75.736,6.263 cw(c75.946,6.053) 75.946,6.35 cw(c75.946,6.647) U1.7@75.736,6.437 ; 78.476,4.953 cw(c78.476,4.292) R12.2@79.011,4.68 ; 78.517,4.953 ccw(c78.517,5.615) R12.2@79.027,5.193 ; R12.2@78.713,4.926 R12.2@79.4,4.926 ; R12.2@78.806,4.531 ccw(c77.978,3.93) 77.978,4.953 ; R12.2@78.832,5.355 cw(c77.978,6.06) 77.978,4.953 ; R12.2@79.375,4.953 77.978,4.953
OUT_SET: R18.2 U1.5 | length 15.6
  Top Layer w0.254: U1.5@74.799,3.81 76.581,3.81 v1(76.962,4.191) ; U1.5@75.142,3.81 ccw(c75.142,6.011) v1@76.698,4.455 ; U1.5@75.736,3.723 cw(c75.946,3.513) 75.946,3.81 cw(c75.946,4.107) U1.5@75.736,3.897 ; U1.5@75.755,3.81 ccw(c75.755,5.398) v1@76.878,4.275 ; 76.368,3.81 ccw(c76.368,4.785) v1@77.057,4.096
  Bottom Layer w0.254: R18.2@75.304,6.764 cw(c74.062,5.521) 75.819,5.521 ; R18.2@75.484,6.943 cw(c74.675,6.134) 75.819,6.134 ; 75.819,5.709 cw(c77.311,5.709) R18.2@76.256,6.764 ; 75.819,6.322 cw(c76.698,6.322) R18.2@76.076,6.943 ; R18.2@75.819,7.239 75.819,5.334 v1(76.962,4.191) ; v1@76.589,4.191 ccw(c75.689,4.191) 76.325,4.828 ccw(c76.962,5.464) v1@76.962,4.564
P_CURRENT: P1.8 R5.2 R7.2 | length 82.6
  Bottom Layer w0.254: P1.8@2.921,16.129 4.699,16.129 5.334,16.764 5.334,19.387 6.521,20.574 36.699,20.574 39.764,17.51 45.787,17.51 45.999,17.297 ; P1.8@3.301,15.817 cw(c4.053,15.065) 4.053,16.129 ; P1.8@3.301,16.339 ccw(c3.808,16.846) 3.808,16.129 ; P1.8@3.481,15.638 cw(c4.667,14.452) 4.667,16.129 ; P1.8@3.481,16.519 ccw(c4.421,17.46) 4.421,16.129 ; 45.938,17.359 45.999,17.297 ; R5.2@55.492,9.541 ccw(c54.343,8.392) 54.343,10.017 ccw(c54.343,11.641) R5.2@55.492,10.493 ; R5.2@55.492,10.543 ccw(c54.343,11.691) 55.968,11.691 ccw(c57.593,11.691) R5.2@56.444,10.543 ; R7.2@55.492,12.25 cw(c54.343,11.101) 55.968,11.101 cw(c57.593,11.102) R7.2@56.444,12.25 ; R5.2@55.672,9.72 ccw(c54.957,9.005) 54.957,10.017 ccw(c54.957,11.028) R5.2@55.672,10.313 ; R5.2@55.672,10.363 ccw(c54.957,11.078) 55.968,11.078 ccw(c56.98,11.078) R5.2@56.264,10.363 ; R7.2@55.672,12.43 cw(c54.956,11.715) 55.968,11.715 cw(c56.98,11.715) R7.2@56.264,12.43 ; R7.2@55.968,12.776 R5.2@55.968,10.017 52.297,10.017 51.391,10.922 47.676,10.922 46.355,12.243 46.355,16.942 45.999,17.297
RESET: P1.6 R13.1 | length 100.6
  Top Layer w0.254: v1@64.102,20.046 ccw(c64.244,20.592) 64.643,20.193 ; v1@64.135,19.685 64.643,20.193 ; v1@64.381,19.685 cw(c64.975,19.685) 64.555,20.105 ; 76.645,20.129 ccw(c77.431,20.916) v1@77.46,19.804 ; 76.923,19.851 cw(c76.503,19.431) v1@77.097,19.431 ; v1@77.216,19.558 v1@77.343,19.431 ; v1@77.47,19.304 v1@77.343,19.431 ; 64.643,20.193 76.581,20.193 v1@77.343,19.431
  Bottom Layer w0.254: 0.82,13.531 cw(c-0.62,12.09) P1.6@1.417,12.09 ; 1.254,13.097 cw(c0.248,12.09) P1.6@1.671,12.09 ; 1.353,12.998 ccw(c2.04,13.685) P1.6@2.04,12.713 ; 1.524,21.209 1.528,21.205 ; P1.6@3.302,12.065 2.286,12.065 0.762,13.589 0.762,20.438 1.528,21.205 ; 63.477,19.431 ccw(c63.477,19.877) v1@63.896,19.725 ; v1@63.657,19.812 cw(c63.115,20.007) 63.115,19.431 ; v1(64.008,19.685) 63.754,19.431 63.115,19.431 ; v1(77.47,19.431) 77.47,19.304 77.597,19.177 77.597,19.05 78.511,18.136 R13.1@79.297,18.136 ; v1@77.589,19.431 ccw(c78.489,19.431) 77.853,18.794 ; v1@77.843,19.431 ccw(c79.357,19.431) 78.286,18.361 ; 1.528,21.205 1.546,21.222 3.302,21.222 3.483,21.222 5.448,21.222 5.588,21.082 36.703,21.082 37.267,21.646 60.9,21.646 63.115,19.431
SET: P1.4 R21.1 | length 119.8
  Top Layer w0.254: P1.4@2.54,8.001 4.318,8.001 ; P1.4@3.344,8.26 ccw(c3.836,8.597) 3.836,8.001 ; P1.4@3.505,7.637 cw(c4.318,6.911) 4.318,8.001 ; P1.4@3.554,8.404 ccw(c4.318,8.927) 4.318,8.001 ; v1(4.699,4.953) 4.699,7.62 4.318,8.001 ; v1@88.222,2.878 ccw(c89.038,3.694) 89.038,2.54 ; v1@88.392,2.54 91.547,2.54 92.409,3.402 92.409,8.028 91.801,8.636 90.551,8.636 v1(90.043,9.144) ; v1@88.402,3.058 ccw(c89.652,4.308) 89.652,2.54
  Bottom Layer w0.254: v1@4.699,5.08 4.826,4.953 5.588,4.953 ; v1@4.965,4.692 cw(c5.588,4.08) 5.588,4.953 ; v1@4.965,5.214 ccw(c5.588,5.826) 5.588,4.953 ; 87.376,2.286 cw(c87.824,1.838) v1@88.021,2.44 ; 87.668,2.578 cw(c87.968,2.278) v1@88.101,2.681 ; v1@88.011,3.048 88.011,2.921 87.503,2.413 73.025,2.413 71.831,1.219 31.166,1.219 30.48,1.905 19.05,1.905 17.589,3.366 12.34,3.366 11.767,2.794 6.858,2.794 5.842,3.81 5.842,4.699 5.588,4.953 ; v1@90.322,8.897 cw(c90.872,8.409) 90.872,9.144 ; v1@90.322,9.391 ccw(c90.872,9.879) 90.872,9.144 ; v1@90.332,9.144 ccw(c90.332,10.15) R21.1@91.329,10.02 ; 90.621,9.144 ccw(c90.621,10.112) R21.1@91.581,9.988 ; 90.91,9.144 ccw(c90.91,10.075) R21.1@91.833,9.955 ; R21.1@91.077,10.053 cw(c90.043,10.187) v1(90.043,9.144) 90.872,9.144 ; R21.1@91.745,10.017 90.872,9.144
  other v1: 88.138,2.794
SR+: C27.2 C28.2 C29.2 R16.1 U5.1 | length 26.3
  Bottom Layer w0.254: R16.1@94.444,6.764 cw(c93.142,5.461) C27.2@94.983,5.461 ; R16.1@94.624,6.943 cw(c93.755,6.074) 94.983,6.074 ; C29.2@94.649,2.138 ccw(c93.842,2.945) 94.983,2.945 ccw(c96.125,2.945) C29.2@95.318,2.138 ; C28.2@94.649,3.183 cw(c93.842,2.376) 94.983,2.376 cw(c96.125,2.376) C28.2@95.318,3.183 ; C28.2@94.649,3.852 ccw(c93.842,4.66) 94.983,4.66 ccw(c96.125,4.66) C28.2@95.318,3.852 ; C27.2@94.649,4.898 cw(c93.842,4.09) 94.983,4.09 cw(c96.125,4.09) C27.2@95.318,4.898 ; C27.2@94.649,5.567 ccw(c93.842,6.374) 94.983,6.374 ccw(c96.125,6.374) C27.2@95.318,5.567 ; R16.1@94.908,7.277 R16.1@94.92,7.29 ; C29.2@94.983,1.803 C28.2@94.983,3.518 C27.2@94.983,5.232 R16.1@94.983,7.099 ; C27.2@94.983,5.768 cw(c96.391,5.768) R16.1@95.396,6.764 ; 94.983,6.382 cw(c95.778,6.382) R16.1@95.216,6.943
  Bottom Layer w0.45: R16.1@95.326,6.933 cw(c96.678,5.581) 96.678,7.493 ; R16.1@95.326,7.746 ccw(c95.938,8.357) 95.938,7.493 ; R16.1@95.428,7.493 U5.1@101.092,7.493
VCC_IN: C6.1 C7.2 C18.2 C24.2 P1.10 R35.2 U4.2 U7.3 U10.3 | length 129.7
  Top Layer w0.254: P1.10@3.276,19.83 cw(c3.905,19.201) 3.905,20.091 cw(c3.905,20.982) P1.10@3.276,20.352 ; P1.10@3.277,20.091 6.579,20.091 7.747,18.923 C6.1@7.747,16.764 ; P1.10@3.455,19.651 cw(c4.519,18.587) 4.519,20.091 cw(c4.519,21.595) P1.10@3.455,20.532 ; 7.493,15.912 cw(c7.978,15.912) C6.1@7.919,16.394 ; 7.493,16.199 cw(c7.943,16.199) C6.1@7.888,16.646 ; C6.1@7.493,16.51 7.493,16.002 7.874,15.621 8.382,15.621 8.89,15.113 v1(8.89,13.97) ; C6.1@7.61,17.028 ccw(c7.28,17.358) 7.747,17.358 ccw(c8.468,17.358) C6.1@7.958,16.848 ; 7.747,17.971 ccw(c9.081,17.971) C6.1@8.138,17.028 ; v1@8.626,13.706 cw(c7.99,13.07) 8.89,13.07 cw(c9.79,13.07) v1@9.154,13.706 ; v1@8.626,14.234 ccw(c7.99,14.87) 8.89,14.87 ccw(c9.79,14.87) v1@9.154,14.234 ; v1@8.89,13.843 v1(8.89,13.97) ; 17.155,12.446 cw(c17.155,10.678) v1@18.405,11.928 ; 17.769,12.446 cw(c17.769,11.292) v1@18.585,12.108 ; v1@18.415,14.097 18.065,13.747 18.065,13.939 17.653,14.351 14.605,14.351 13.97,13.716 13.97,12.446 13.462,11.938 9.525,11.938 8.89,12.573 v1(8.89,13.97) ; v1@18.542,12.446 16.637,12.446 16.129,11.938 16.129,4.699 16.637,4.191 21.287,4.191 U4.2@21.336,4.142 23.954,4.142 24.809,4.997 24.809,8.452 24.892,8.535 24.892,10.541 25.654,11.303 U7.3@25.654,12.827 ; 19.117,4.191 cw(c19.117,3.123) U4.2@19.872,3.878 ; 19.354,4.191 ccw(c19.354,4.924) U4.2@19.872,4.406 ; U4.2@22.8,3.878 cw(c23.436,3.242) 23.436,4.142 cw(c23.436,5.042) U4.2@22.8,4.406 ; U7.3@25.391,12.407 cw(c24.757,11.773) 25.654,11.773 ; 25.654,11.768 cw(c26.558,11.768) U7.3@25.919,12.407 ; U7.3@25.655,12.971 26.433,12.971 ; U7.3@25.946,12.737 cw(c26.433,12.346) 26.433,12.971 ; U7.3@25.946,13.205 ccw(c26.433,13.596) 26.433,12.971 ; v1@27.295,15.23 cw(c26.659,14.594) 27.559,14.594 cw(c28.459,14.594) v1@27.823,15.23 ; v1(27.559,15.494) 27.559,14.097 26.433,12.971 ; v1@32.131,13.47 cw(c32.131,12.57) 32.768,13.206 cw(c33.404,13.843) v1@32.504,13.843 ; v1(32.131,13.843) 33.02,12.954 ; U10.3@33.169,13.068 cw(c33.02,13.108) 33.02,12.954 ; U10.3@33.179,12.843 ccw(c33.02,12.785) 33.02,12.954 ; U10.3@33.265,13.535 ccw(c32.629,14.172) 33.529,14.172 ccw(c34.43,14.172) U10.3@33.793,13.535 ; U10.3@33.401,12.954 33.02,12.954 ; U10.3@33.529,12.971 33.529,14.352 34.29,15.113 35.941,15.113 36.83,16.002 ; v1@36.601,16.469 cw(c36.238,16.002) 36.83,16.002 ; v1(36.83,16.764) 36.83,16.002 ; v1@37.059,16.469 ccw(c37.422,16.002) 36.83,16.002
  Bottom Layer w0.254: v1@8.626,13.706 cw(c7.99,13.07) 8.89,13.07 cw(c9.79,13.07) v1@9.154,13.706 ; v1(8.89,13.97) 8.89,8.853 C7.2@10.453,7.29 ; 9.219,8.524 ccw(c10.453,9.758) C7.2@10.453,8.013 ; 9.339,8.403 cw(c8.276,7.34) C7.2@9.78,7.34 ; 9.652,8.091 ccw(c10.453,8.891) C7.2@10.453,7.759 ; C7.2@9.773,7.97 cw(c9.143,7.34) C7.2@10.034,7.34 ; v1@18.288,13.597 cw(c18.288,12.39) R35.2@19.142,13.243 ; v1@18.288,13.851 cw(c18.288,13.257) 18.708,13.677 ; v1(18.288,13.97) 18.288,14.097 R35.2@19.304,13.081 ; v1@18.291,14.094 cw(c17.07,12.873) R35.2@18.797,12.873 ; v1@18.393,13.992 ccw(c19.47,15.069) R35.2@19.47,13.546 ; v1@18.661,13.97 ccw(c19.255,13.97) R35.2@18.835,13.55 ; v1(18.669,12.192) R35.2@18.923,12.192 ; R35.2@18.725,13.66 cw(c17.938,12.873) R35.2@19.051,12.873 ; R35.2@18.826,13.559 ccw(c19.47,14.202) R35.2@19.47,13.292 ; v1@27.823,15.23 cw(c28.459,14.594) 28.459,15.494 cw(c28.459,16.394) v1@27.823,15.758 ; v1@28.045,15.494 cw(c28.045,14.878) C18.2@28.551,15.23 ; 28.082,15.494 ccw(c28.082,16.109) C18.2@28.566,15.729 ; C18.2@28.321,15.367 C18.2@28.829,15.367 ; C18.2@28.342,15.085 ccw(c27.559,14.539) v1(27.559,15.494) ; C18.2@28.366,15.886 cw(c27.559,16.521) v1(27.559,15.494) ; C18.2@28.895,15.519 30.963,15.519 32.131,14.351 v1(32.131,13.843) ; C18.2@29.083,15.494 v1(27.559,15.494) ; C18.2@29.191,15.223 cw(c29.906,14.508) 29.906,15.519 cw(c29.906,16.531) C18.2@29.191,15.816 ; C18.2@29.371,15.044 cw(c30.52,13.895) 30.52,15.519 cw(c30.52,17.144) C18.2@29.371,15.995 ; 31.135,15.347 cw(c29.631,13.843) v1@31.758,13.843 ; 31.569,14.913 cw(c30.498,13.843) v1@32.012,13.843 ; 32.002,14.48 cw(c31.366,13.843) v1@32.266,13.843 ; v1@36.569,16.498 cw(c35.957,15.875) C24.2@36.83,15.875 ; v1@36.83,16.486 ccw(c37.332,16.486) C24.2@37.287,15.987 ; v1@37.091,16.498 ccw(c37.703,15.875) C24.2@36.83,15.875 ; C24.2@37.211,15.494 C24.2@36.83,15.875 ; C24.2@37.224,15.494 C24.2@37.25,15.519 ; C24.2@37.31,16.24 cw(c37.356,16.764) v1(36.83,16.764) C24.2@36.83,15.875
pads on no net: U1.1 U1.8 U3.1 U3.2 U3.3 U6.1 U6.6 U6.7 U9.3

## Polygon pours and split planes (outlines as drawn)
GNDA on Top Layer "Top Laye" (solid, remove dead copper, pour order 1000): 0,22.225 108.204,22.225 108.204,0 0,0
GNDA on Bottom Layer "Top Laye" (solid, remove dead copper, pour order 1001): 0,22.225 108.204,22.225 108.204,0 0,0

## Keep-outs
Keep-Out Layer:
  lines w0.3: 0,0 0,22.177 108.204,22.177 108.204,0 0,0

## Other copper
Top Layer:
  region net -5V0: 72.009,18.796 70.993,17.78 69.85,18.796
  pour cut-out: 108.204,22.098 99.187,22.098 99.187,0 108.204,0
  region net GNDA: 58.674,4.572 57.785,3.683 59.436,3.683
  region net GNDA: 84.963,2.667 85.725,3.429 85.725,2.032
Bottom Layer:
  region net NetC4_1: 78.994,14.224 74.93,14.224 74.93,9.652 78.994,9.652
  region net GNDD: 68.961,14.478 72.771,14.478 72.771,9.525 68.961,9.525
  region net NetQ4_1: 56.769,8.763 57.277,9.271 57.277,8.255
  pour cut-out: 108.204,22.098 99.187,22.098 99.187,0 108.204,0

## Silkscreen, mask and mechanical layers (free items; w line width, h text height)
Bottom Solder:
  drawing of 15 lines, arcs and shapes, not listed

## Text inside footprints (layer, text, board x,y; h text height)
C1: Bottom Overlay "+" at 71.793,4.017 h1
C4: Bottom Overlay "+" at 75.717,11.227 h1 r180
C8: Bottom Overlay "+" at 12.319,11.967 h1
C12: Top Overlay "+" at 71.918,13.005 h1 r180
C13: Top Overlay "+" at 71.918,10.465 h1 r180
C15: Bottom Overlay "+" at 29.707,8.803 h1
C23: Bottom Overlay "+" at 38.608,9.098 h1
C27: Bottom Overlay "+" at 92.647,5.512 h0.6 r180
C28: Bottom Overlay "+" at 92.647,3.797 h0.6 r180
C29: Bottom Overlay "+" at 92.647,2.083 h0.6 r180